# Altium PCB RoControl.PcbDoc
Units mil, origin at the board's own origin, x right, y up, seen from the top; angles counter-clockwise.
Board outline 2550 x 3550 mil, 2 copper layers (Top Layer, Bottom Layer); 101 components, 124 nets, 392 pads, 121 vias.
Unrouted connection lines stored in the file: 1.
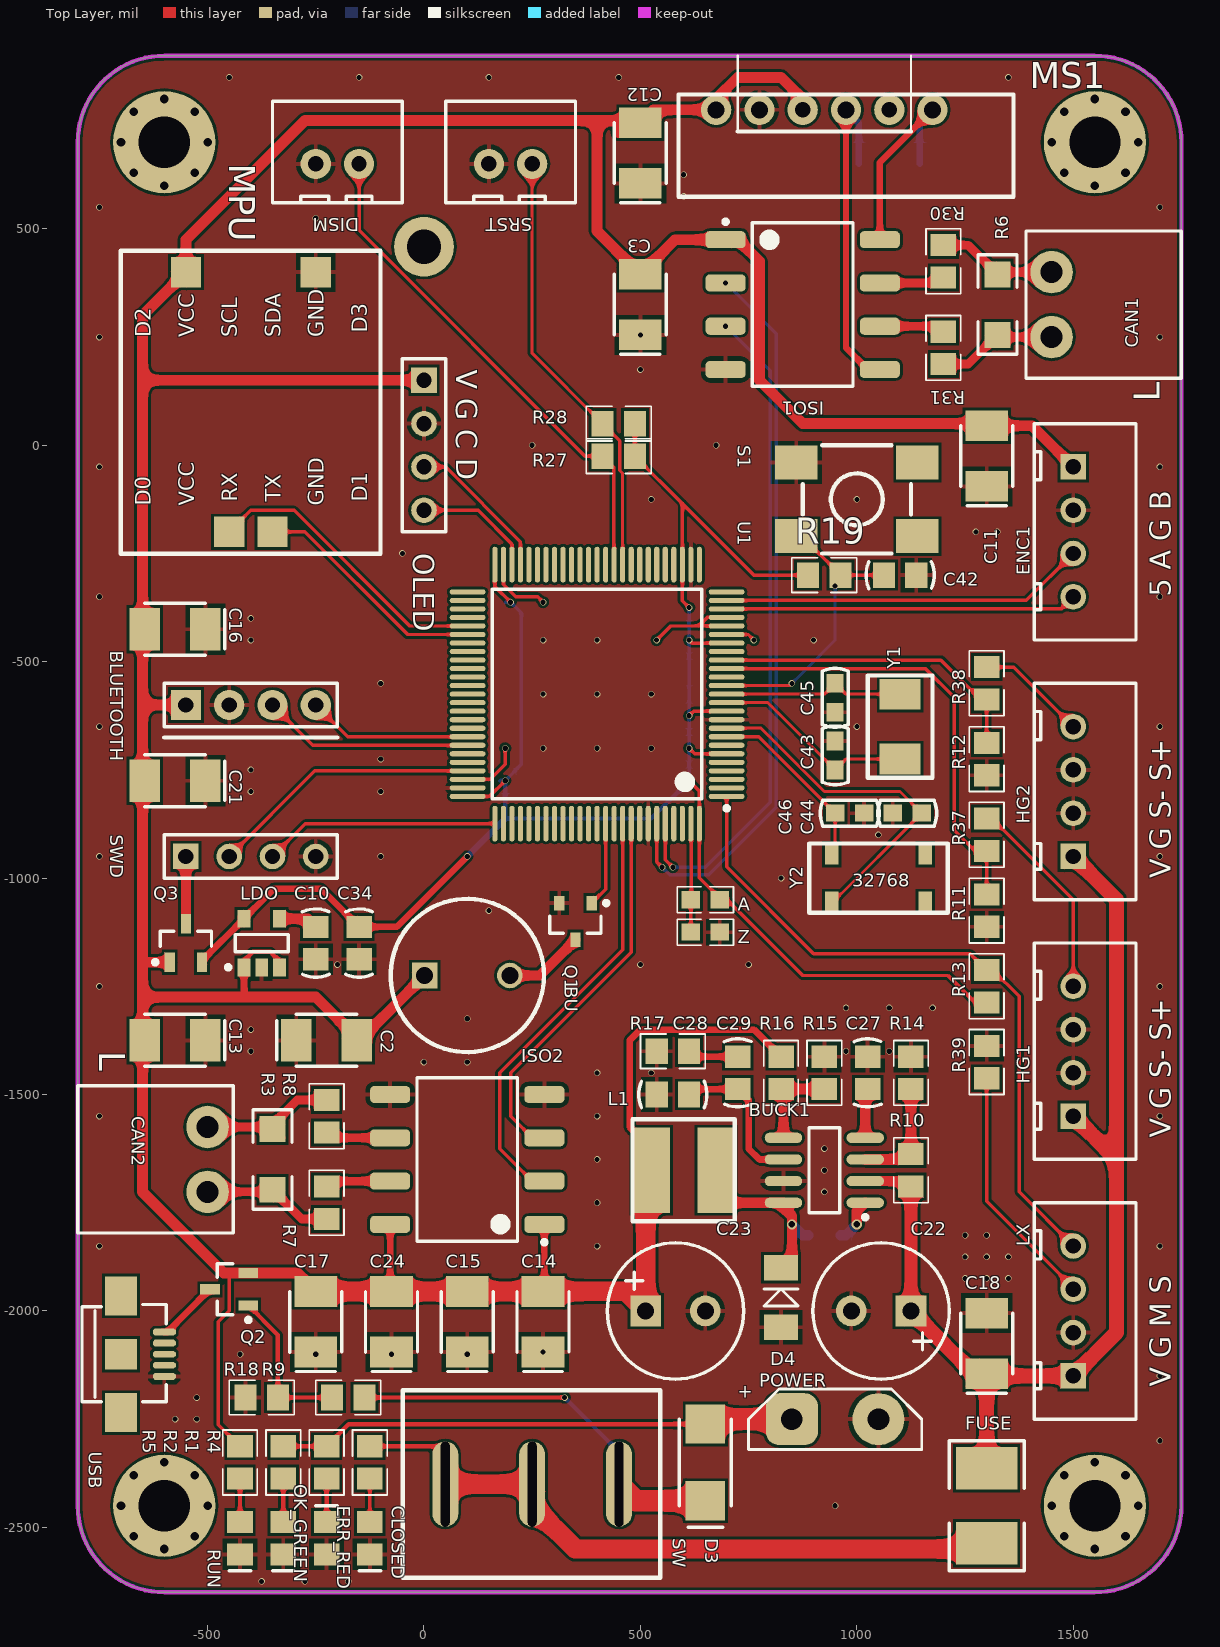
[diagram p0: Top Layer view]
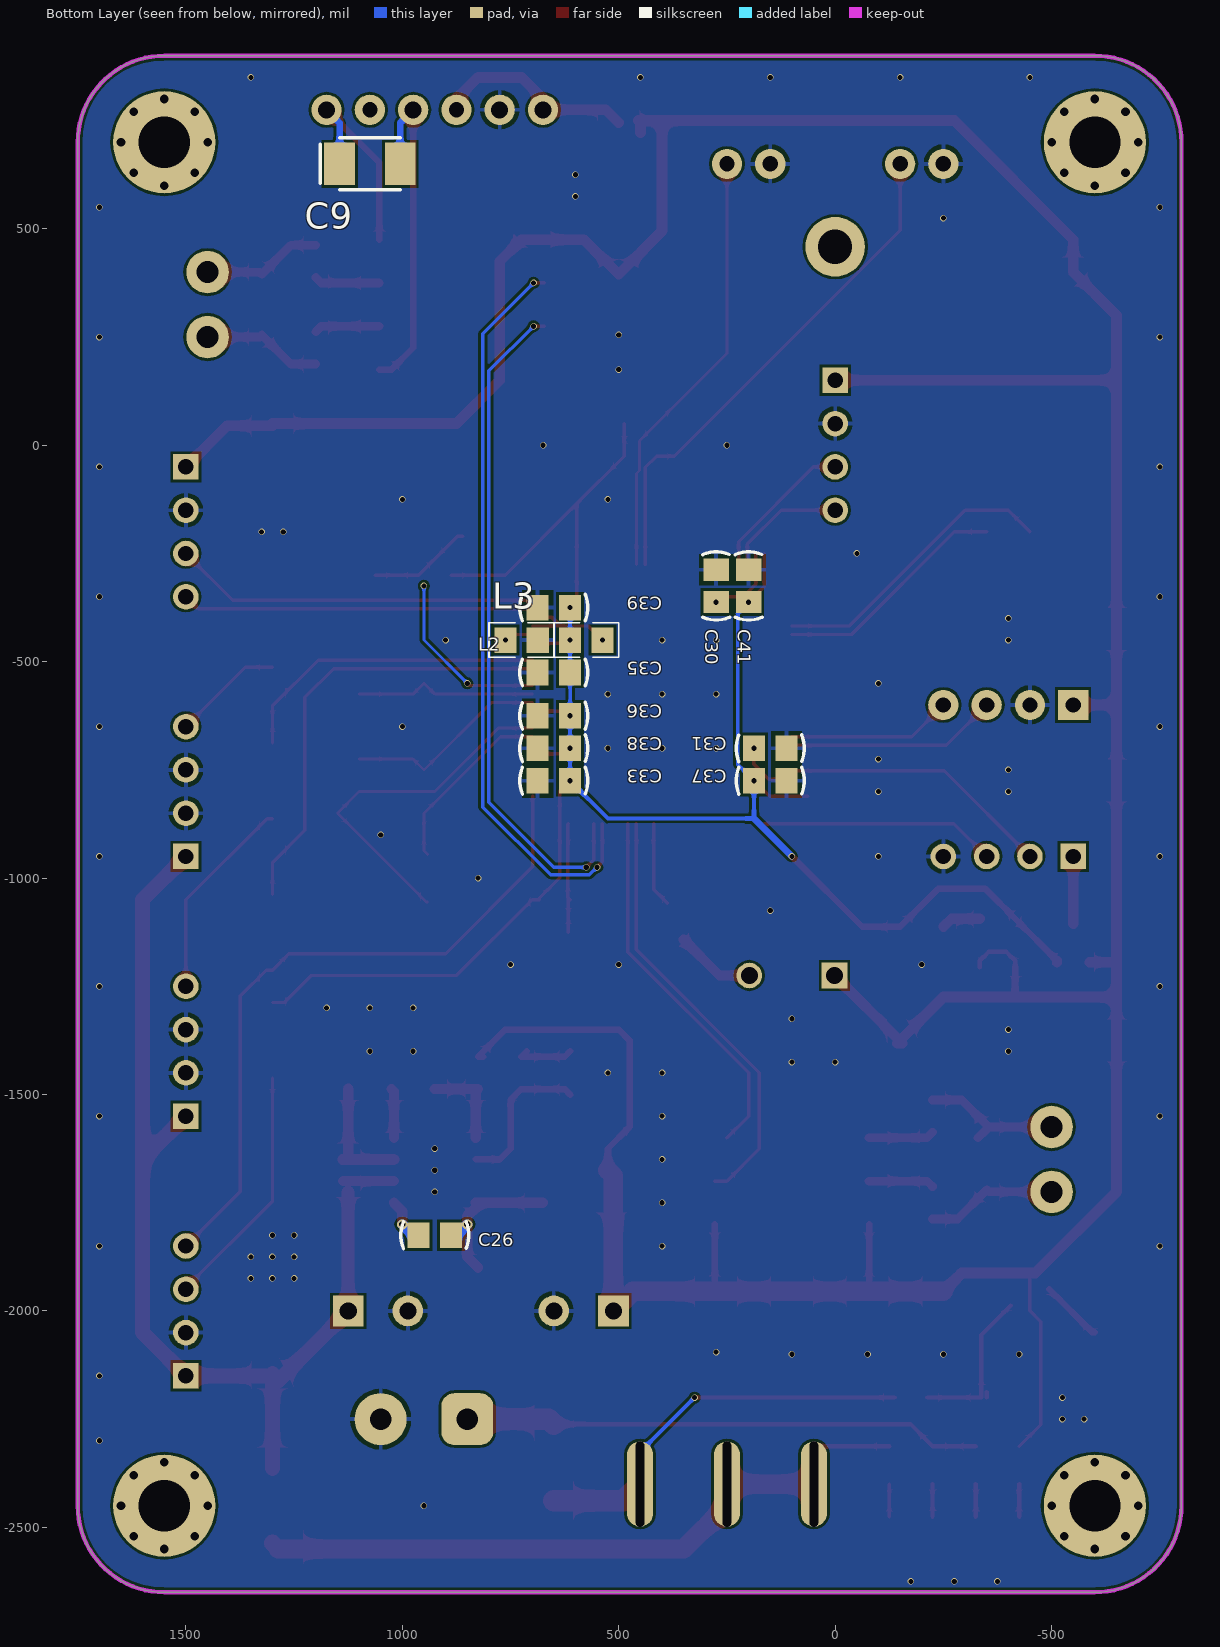
[diagram p1: Bottom Layer view, seen from below]

## Layer stack, top to bottom
Top Solder: solder mask 0.4, Solder Resist, Dk 3.5
Top Layer: signal copper 1.4
Dielectric1: dielectric 12.6, FR-4, Dk 4.8
Bottom Layer: signal copper 1.4
Bottom Solder: solder mask 0.4, Solder Resist, Dk 3.5

## Board outline
-800,-2450 -800,700 cw(c-600,700) -600,900 1550,900 cw(c1550,700) 1750,700 1750,-2450 cw(c1550,-2450) 1550,-2650 -600,-2650 cw(c-600,-2450)

## Design rules (kind name [scope] priority, off if disabled: settings)
Clearance [All] p1: gap=6
ComponentClearance [All] p1 off: gap=1 collisioncheckmode=3 verticalgap=1 showdistances=FALSE
MinimumSolderMaskSliver [All] p1: minsoldermaskwidth=5
PlaneConnect [All] p1: planeconnectstyle=Direct reliefexpansion=20 reliefentries=4 reliefconductorwidth=10 reliefairgap=10
PolygonConnect PolygonConnect_Via [IsVia] p1: connectstyle=Direct reliefconductorwidth=10 reliefentries=4 polygonreliefangle="90 Angle" airgapwidth=10
PolygonConnect [All] p2: connectstyle=Relief reliefconductorwidth=10 reliefentries=4 polygonreliefangle="90 Angle" airgapwidth=10
RoutingCorners [All] p1: cornerstyle=Round minsetback=100 maxsetback=100
RoutingVias [All] p1: holewidth=10 width=15 viastyle="Through Hole" minholewidth=10 minwidth=15 maxholewidth=10 maxwidth=15
SilkToSilkClearance [All] p1: silktosilkclearance=5
SilkToSolderMaskClearance SilkscreenOverComponentPads [IsPad] p1: minsilkscreentomaskgap=10 clearancetoexposedcopper=TRUE
SolderMaskExpansion [All] p1: expansion=4
Width [All] p1: maxlimit=500 minlimit=6 preferedwidth=8
Width GND [InNet('GND')] p2: maxlimit=20 minlimit=15 preferedwidth=15 minimp=50.000000 maximp=50.000000 favimp=50.000000
24 further rules are at their usual default settings.

## Components (designator, comment, footprint, x,y, rotation, side; value= is the part's Value field where it differs from the comment)
A "Res1" 0603-1 650,-1050 r180 top
BLUETOOTH "Header 4" HDR1X4#1 -250,-600 r180 top
BU "BEEP" BEEP 100,-1225 r0 top
BUCK1 "TPS54231/2/3" SOIC8_N 925,-1675 r180 top
C2 "Cap" CAP-3528 -225,-1375 r0 top
C3 "Cap" CAP-3528 500,325 r90 top
C9 "Cap" CAP-3528 1075,650 r180 bottom
C10 "Cap" C-RAD-0805 -250,-1150 r90 top
C11 "Cap" CAP-3528 1300,-25 r90 top
C12 "Cap" CAP-3528 500,675 r90 top
C13 "Cap" CAP-3528 -575,-1375 r180 top
C14 "Cap" CAP-3528 275,-2025 r90 top
C15 "Cap" CAP-3528 100,-2025 r90 top
C16 "Cap" CAP-3528 -575,-425 r180 top
C17 "Cap" CAP-3528 -250,-2025 r90 top
C18 "Cap Pol" CAP-3528 1300,-2075 r90 top
C21 "Cap" CAP-3528 -575,-775 r180 top
C22 "Cap Pol" C-RB-8 1125,-2000 r180 top
C23 "Cap Pol" C-RB-8 512.2,-2000 r0 top
C24 "Cap" CAP-3528 -75,-2025 r90 top
C26 "Cap" C-RAD-0805 925,-1825 r0 bottom
C27 "Cap" C-RAD-0805 1025,-1450 r270 top
C28 "Cap" C-RAD-0805 575,-1500 r0 top
C29 "Cap" C-RAD-0805 725,-1450 r270 top
C30 "Cap" C-RAD-0805 275,-325 r90 bottom
C31 "Cap" C-RAD-0805 150,-700 r180 bottom
C33 "Cap" C-RAD-0805 650,-775 r180 bottom
C34 "Cap" C-RAD-0805 -150,-1150 r90 top
C35 "Cap" C-RAD-0805 650,-525 r180 bottom
C36 "Cap" C-RAD-0805 650,-625 r180 bottom
C37 "Cap" C-RAD-0805 150,-775 r0 bottom
C38 "Cap" C-RAD-0805 650,-700 r180 bottom
C39 "Cap" C-RAD-0805 650,-375 r180 bottom
C41 "Cap" C-RAD-0805 200,-325 r270 bottom
C42 "Cap" C-RAD-0805 1100,-300 r180 top
C43 "Cap" C-RAD-0603 950,-716.54 r270 top
C44 "Cap" C-RAD-0603 1116.54,-850 r0 top
C45 "Cap" C-RAD-0603 950,-583.46 r90 top
C46 "Cap" C-RAD-0603 983.46,-850 r180 top
CAN1 "Header 2" HDR2X1_C 1450,250 r90 top
CAN2 "Header 2" HDR2X1_C -500,-1575 r270 top
CLOSED "LED0" LED_0805 -125,-2525 r270 top
D3 "Diode" DIODE-SMA 650,-2350 r270 top
D4 "D-Schottky" DIODE-1206 825,-2037.8 r90 top
DISM "Header 2" HDR2X1_B1 -250,650 r0 top
ENC1 "Header 4" HDR4X1_B1#1 1500,-50 r270 top
ERR_RED "LED0" LED_0805 -225,-2525 r90 top
FUSE "Fuse" 1812 1300,-2450 r270 top
HG1 "Header 4" HDR4X1_B1#2 1500,-1250 r270 top
HG2 "Header 4" HDR4X1_B1#2 1500,-650 r270 top
ISO1 "ISO1050" SOP254P1040X485-8N 875,325 r0 top
ISO2 "ISO1050" SOP254P1040X485-8N 100,-1650 r180 top
L1 "Inductor" CD54 600,-1675 r180 top
L2 "Inductor" 0805-1 575,-450 r0 bottom
L3 "Inductor" 0805-1 724.61,-450 r0 bottom
LDO "RT9193" SOT104P300X129-5N -375,-1150 r90 top
LX "Header 4" HDR4X1_B1#2 1500,-1850 r270 top
MPU "JY-901" "JY-901 - duplicate" -150.37,-200.63 r90 top
MS1 "IF0505_S" MORNSUN_SIP_LS 975,775 r0 top
OK_GREEN "LED0" LED_0805 -325,-2525 r270 top
OLED "Header 4" HDR1X4#2 0,150 r270 top
POWER "BIG SWITCH" "HEADER 2" 950,-2250 r90 top
Q1 "SI2302" SOT-23_L 350,-1100 r270 top
Q2 "SI2301" SOT-23_N -450,-1950 r180 top
Q3 "SI2301" SOT-23_N -550,-1150 r90 top
R1 "Res1" 0805-1 -325,-2350 r270 top
R2 "Res1" 0805-1 -225,-2350 r270 top
R3 "Res1" 1206 -350,-1650 r270 top
R4 "Res1" 0805-1 -125,-2350 r90 top
R5 "Res1" 0805-1 -425,-2350 r90 top
R6 "Res1" 1206 1325,325 r90 top
R7 "Res1" 0805-1 -225,-1750 r90 top
R8 "Res1" 0805-1 -225,-1550 r270 top
R9 "Res1" 0805-1 -175,-2200 r0 top
R10 "Res1" 0805-1 1125,-1675 r90 top
R11 "Res1" 0805-1 1300,-1075 r270 top
R12 "Res1" 0805-1 1300,-725 r270 top
R13 "Res1" 0805-1 1300,-1250 r270 top
R14 "Res1" 0805-1 1125,-1450 r90 top
R15 "Res1" 0805-1 925,-1450 r90 top
R16 "Res1" 0805-1 825,-1450 r270 top
R17 "Res1" 0805-1 575,-1400 r0 top
R18 "Res1" 0805-1 -375,-2200 r0 top
R19 "Res1" 0805-1 925,-300 r180 top
R27 "Res1" 0805-1 450,-25 r180 top
R28 "Res1" 0805-1 450,50 r180 top
R30 "Res1" 0805-1 1200,425 r270 top
R31 "Res1" 0805-1 1200,225 r90 top
R37 "Res1" 0805-1 1300,-900 r270 top
R38 "Res1" 0805-1 1300,-550 r270 top
R39 "Res1" 0805-1 1300,-1425 r90 top
RUN "LED0" LED_0805 -425,-2525 r270 top
S1 "SW-PB4" SW_PB4_A1 1000,-125 r180 top
SRST "Header 2" HDR2X1_B1 150,650 r0 top
SW "SW-SPST" SW-SPST 250.79,-2390 r270 top
SWD "Header 4" HDR1X4#3 -250,-950 r180 top
U1 "STM32F407V" LQFP-100_M 400,-575 r180 top
USB "USB_M" USB_MICRO -700,-2100 r270 top
Y1 "XTAL5032" XTAL_5032 1100,-650 r90 top
Y2 "32.768K" 32.768K_SMD 1050,-1000 r0 top
Z "Res1" 0603-1 650,-1125 r0 top

## Footprints (in the part's own frame and the unit in brackets; to place one, negate y for a bottom-side part, rotate by r counter-clockwise, add the part's x,y. Pads: shape width x height; smd on the part's side, far side on the other; paste and mask are expansions set on the pad)
32.768K_SMD [mm]
  rect 0.8x1.2 smd: 1(-2.75,-1.4) 2(2.75,-1.4) 3(2.75,1.4) 4(-2.75,1.4)
  silkscreen extent -4.06,-2.03 4.06,2.03
0603-1 [mm] "贴片带丝印"
  rect 1.1x1 smd: 1(-0.85,0) 2(0.85,0)
  silkscreen extent -1.65,-0.76 1.65,0.76, body extent -1.14,-0.38 1.14,0.38, height 1
0805-1 [mm] "贴片带丝印"
  rect 1.3x1.5 smd: 1(-0.95,0) 2(0.95,0)
  silkscreen extent -1.91,-1.02 1.91,1.02, body extent -1.14,-0.51 1.14,0.51, height 1
1206 [mil] "贴片元件"
  rect 60x60 smd: 1(-70,0) 2(70,0)
  silkscreen extent -115,-45 115,45, body extent -75,-35 75,35, height 39
1812 [mm] "保险丝"
  rect 2.5x3.6 smd: 1(-2.2,0) 2(2.2,0)
  silkscreen extent -3.81,-2.2 3.81,2.2, body extent -2.54,-1.65 2.67,1.65, height 1.2
BEEP [mm]
  rect 1.5x1.5 hole 1: 1(-2.5,0)
  round 1.5 hole 1: 2(2.5,0)
  silkscreen extent -4.5,-4.5 4.5,4.5
C-RAD-0603 [mm] "贴片电容"
  rect 1.1x1 smd: 1(-0.85,0) 2(0.85,0)
  silkscreen extent -1.73,-0.76 1.73,0.76, body extent -1.14,-0.38 1.14,0.38, height 1
C-RAD-0805 [mm] "贴片电容"
  rect 1.3x1.5 smd: 1(-0.95,0) 2(0.95,0)
  silkscreen extent -2,-0.79 2,0.79, body extent -1.27,-0.64 1.27,0.64, height 0.9
C-RB-8 [mm] "35V 220UF电容"
  rect 1.8x1.8 hole 1: 1(0,0)
  round 1.8 hole 1: 2(3.5,0)
  silkscreen extent -2.25,-4 5.75,4
CAP-3528 [mm] "钽电容"
  rect 1.8x2.5 smd: 1(-1.778,0) 2(1.778,0)
  silkscreen extent -2.92,-1.52 1.78,1.52, body extent -1.91,-1.4 1.91,1.4, height 1.1
CD54 [mm]
  rect 2.2x5 smd: 1(-1.9,0) 2(1.9,0)
  silkscreen extent -3,-3 3,3
DIODE-1206 [mm] "玻璃封装二极管"
  rect 1.5x2 smd: 1(0,0) 2(3.5,0)
  silkscreen extent 1.25,-1 2.25,1
DIODE-SMA [mm] "贴片二极管"
  rect 2.3x2.3 smd: 1(-2.25,0) 2(2.25,0)
  silkscreen extent -2.54,-1.52 3.81,1.52, body extent -2.92,-1.4 2.92,1.4, height 3
HDR1X4#1 [mil] "Connector; Header; 4 Position"
  round 70 hole 35.43: 1(0,0) 2(100,0) 3(200,0)
  rect 70x70 hole 35.43: 4(300,0)
  silkscreen extent -50,-50 350,50
HDR1X4#2 [mil] "Connector; Header; 4 Position"
  rect 59.06x59.06 hole 35.43: 1(0,0)
  round 59.06 hole 35.43: 2(100,0) 3(200,0) 4(300,0)
  silkscreen extent -50,-50 350,50
HDR1X4#3 [mil] "Connector; Header; 4 Position"
  round 59.06 hole 35.43: 1(0,0) 2(100,0) 3(200,0)
  rect 59.06x59.06 hole 35.43: 4(300,0)
  silkscreen extent -50,-50 350,50
HDR2X1_B1 [mil] "Connector; Header; 4 Position"
  round 70 hole 35.43: 1(0,0) 2(100,0)
  silkscreen extent -100,-90 200,145, body extent -95,-85 200,140, height 59
HDR2X1_C [mm] "3.81接插件"
  round 2.5 hole 1.3: 1(0,0) 2(3.81,0)
  silkscreen extent -2.41,-7.62 6.22,1.5, body extent -2.41,-7.62 6.22,1.4, height 5
HDR4X1_B1#1 [mm] "Connector; Header; 4 Position"
  rect 1.5x1.5 hole 0.9: 1(0,0)
  round 1.5 hole 0.9: 2(2.54,0) 3(5.08,0) 4(7.62,0)
  silkscreen extent -2.54,-2.29 10.16,3.68, body extent -2.41,-2.16 10.03,3.56, height 1.5
HDR4X1_B1#2 [mm] "Connector; Header; 4 Position"
  round 1.5 hole 0.9: 1(0,0) 2(2.54,0) 3(5.08,0)
  rect 1.5x1.5 hole 0.9: 4(7.62,0)
  silkscreen extent -2.54,-2.29 10.16,3.68, body extent -2.41,-2.16 10.03,3.56, height 1.5
"HEADER 2" [mil]
  round 120 hole 50: 1(0,-100)
  rrect50% 120x120 hole 50: 2(0,100)
  silkscreen extent -70,-200 70,200
"JY-901 - duplicate" [mil]
  rect 70x70 smd: 3(0.63,299.63) 4(0.63,199.63) 8(600.63,99.63) 11(600.63,399.63)
  silkscreen extent -50,-50 650,550
LED_0805 [mm] "贴片二极管"
  rect 1.3x1.5 smd: 1(-0.95,0) 2(0.95,0)
  silkscreen extent 1.91,-0.63 1.91,0.64
LQFP-100_M [mm] "Thin QFP, 100"
  oval 2.1x0.3 smd: 1(-7.6,6) 2(-7.6,5.5) 3(-7.6,5) 4(-7.6,4.5) 5(-7.6,4) 6(-7.6,3.5) 7(-7.6,3) 8(-7.6,2.5) 9(-7.6,2) 10(-7.6,1.5) 11(-7.6,1) 12(-7.6,0.5) 13(-7.6,0) 14(-7.6,-0.5) 15(-7.6,-1) 16(-7.6,-1.5) 17(-7.6,-2) 18(-7.6,-2.5) 19(-7.6,-3) 20(-7.6,-3.5) 21(-7.6,-4) 22(-7.6,-4.5) 23(-7.6,-5) 24(-7.6,-5.5) 25(-7.6,-6) 51(7.6,-6) 52(7.6,-5.5) 53(7.6,-5) 54(7.6,-4.5) 55(7.6,-4) 56(7.6,-3.5) 57(7.6,-3) 58(7.6,-2.5) 59(7.6,-2) 60(7.6,-1.5) 61(7.6,-1) 62(7.6,-0.5) 63(7.6,0) 64(7.6,0.5) 65(7.6,1) 66(7.6,1.5) 67(7.6,2) 68(7.6,2.5) 69(7.6,3) 70(7.6,3.5) 71(7.6,4) 72(7.6,4.5) 73(7.6,5) 74(7.6,5.5) 75(7.6,6)
  oval 0.3x2.1 smd: 26(-6,-7.6) 27(-5.5,-7.6) 28(-5,-7.6) 29(-4.5,-7.6) 30(-4,-7.6) 31(-3.5,-7.6) 32(-3,-7.6) 33(-2.5,-7.6) 34(-2,-7.6) 35(-1.5,-7.6) 36(-1,-7.6) 37(-0.5,-7.6) 38(0,-7.6) 39(0.5,-7.6) 40(1,-7.6) 41(1.5,-7.6) 42(2,-7.6) 43(2.5,-7.6) 44(3,-7.6) 45(3.5,-7.6) 46(4,-7.6) 47(4.5,-7.6) 48(5,-7.6) 49(5.5,-7.6) 50(6,-7.6) 76(6,7.6) 77(5.5,7.6) 78(5,7.6) 79(4.5,7.6) 80(4,7.6) 81(3.5,7.6) 82(3,7.6) 83(2.5,7.6) 84(2,7.6) 85(1.5,7.6) 86(1,7.6) 87(0.5,7.6) 88(0,7.6) 89(-0.5,7.6) 90(-1,7.6) 91(-1.5,7.6) 92(-2,7.6) 93(-2.5,7.6) 94(-3,7.6) 95(-3.5,7.6) 96(-4,7.6) 97(-4.5,7.6) 98(-5,7.6) 99(-5.5,7.6) 100(-6,7.6)
  silkscreen extent -7.73,-6.15 6.15,6.82, body extent -7,-7 7,7, height 0.8
MORNSUN_SIP_LS [mil]
  round 70 hole 39.37: 1(-300,0) 2(-200,0) 4(0,0) 6(200,0)
  silkscreen extent -387,-201 387,35, body extent -387,-201 387,35, height 400
SOIC8_N [mm] "8-Pin Small Outline Integrated Circuit Package (SOIC8), IPC Medium Density"
  oval 2.2x0.6 smd: 1(-2.4,1.905) 2(-2.4,0.635) 3(-2.4,-0.635) 4(-2.4,-1.905) 5(2.4,-1.905) 6(2.4,-0.635) 7(2.4,0.635) 8(2.4,1.905)
  silkscreen extent -2.53,-2.5 0.9,2.88, body extent -1.95,-2.45 1.95,2.45, height 1.75
SOP254P1040X485-8N [mm] "SOP, 8-Leads, Body 9.50x6.62mm, Pitch 2.54mm, IPC Medium Density"
  rrect50% 2.35x1 smd: 1(-4.525,3.81) 2(-4.525,1.27) 3(-4.525,-1.27) 4(-4.525,-3.81) 5(4.525,-3.81) 6(4.525,-1.27) 7(4.525,1.27) 8(4.525,3.81)
  silkscreen extent -4.65,-4.8 2.95,4.98, body extent -3.35,-4.8 3.35,4.8, height 4.85
SOT104P300X129-5N [mm] "SOT23, 5-Leads, Body 3.10x3.00mm, Pitch 1.04mm, IPC Medium Density"
  rect 1.05x0.75 smd: 1(-1.425,1.041) 2(-1.425,0) 3(-1.425,-1.041) 4(1.425,-1.041) 5(1.425,1.041)
  silkscreen extent -1.55,-1.55 0.5,2.09, body extent -0.9,-1.55 0.9,1.55, height 1.3
SOT-23_L [mm] "SOT23, 3-Leads, Body 2.9x1.3mm, Pitch 0.95mm, Lead Span 2.3mm, IPC High Density"
  rect 0.85x0.6 smd: 1(-1.075,0.95) 2(-1.075,-0.95) 3(1.075,0)
  silkscreen extent -1.2,-1.5 0.7,1.93, body extent -0.7,-1.5 0.7,1.5, height 1.11
SOT-23_N [mm] "SOT23, 3-Leads, Body 2.9x1.3mm, Pitch 0.95mm, Lead Span 2.3mm, IPC Medium Density"
  rect 1.15x0.6 smd: 1(-1.125,0.95) 2(-1.125,-0.95) 3(1.125,0)
  silkscreen extent -1.25,-1.5 0.7,1.92, body extent -0.7,-1.5 0.7,1.5, height 1.11
SW-SPST [mil]
  oval 196.85x60 hole 20 slot 196.85 at 0 deg: 1(10,200) 2(10,-0.79) 3(10,-201.57)
  silkscreen extent -207,-300 227,295, body extent -207,-300 227,295, height 150
SW_PB4_A1 [mil]
  rect 98.42x78.74 smd: 1(-140,85) 2(-140,-85) 3(140,-85) 4(140,85)
  silkscreen extent -125,-125 125,125, body extent -125,-125 125,125, height 236
USB_MICRO [mm] "USB方孔"
  oct 0.4x1.35 smd: 1(-1.3,2.54) 2(-0.65,2.54) 3(0,2.54) 4(0.65,2.54) 5(1.3,2.54)
  rect 2.286x1.9 smd: 6(3.429,0) 7(-3.429,0)
  rect 1.8x1.9 smd: 8(0,0)
  silkscreen extent -2.92,-2.29 2.79,2.67
XTAL_5032 [mm]
  rect 1.8x2.4 smd: 1(-1.9,0) 2(1.9,0)
  silkscreen extent -3,-1.9 3,1.9

## Part data
A R1 R2 R3 R4 R5 R6 R7 R8 R9 R10 R11 R12 R13 R14 R15 R16 R17 R18 R19 R27 R28 R30 R31 R37 R38 R39 Z: "贴片电阻"
BLUETOOTH OLED SWD: "Header, 4-Pin"
BU: "蜂鸣器"
C2 C3 C9 C10 C11 C12 C13 C14 C15 C16 C17 C21 C24 C26 C27 C28 C29 C30 C31 C33 C34 C35 C36 C37 C38 C39 C41 C42 C43 C44 C45 C46: "无极性电容"
C18 C22 C23: "极性电解电容"
CAN1 CAN2 DISM ENC1 HG1 HG2 LX SRST: "接插件"
CLOSED ERR_RED OK_GREEN RUN: "发光二极管"
D3: "二极管"
D4: "肖特基二极管"
FUSE: library part "Fuse 2", "保险丝"
L1 L2 L3: "电感"
MPU: "君悦智控高精度9轴传感器"
POWER: library part "Header 2 BIG", "Header, 2-Pin"
Q1: library part IRLML2402, "HEXFET Power MOSFET"
Q2 Q3: library part IRLML5103, "HEXFET Power MOSFET"
S1: "微动开关"
SW: "Single-Pole, Single-Throw Switch"
U1: "STM32单片机100引脚"
USB: "MicroUSB接口"

## Free pads (board coordinates)
  round 236.22 hole 118.11: 0(-600,-2450) 0(-600,700) 0(1550,-2450) 0(1550,700)
  round 19.68 hole 19.68: 5(-600,-2350) 5(-600,800) 5(1550,-2350) 5(1550,800) 6(-670.71,-2379.29) 6(-670.71,770.71) 6(1479.29,-2379.29) 6(1479.29,770.71) 7(-700,-2450) 7(-700,700) 7(1450,-2450) 7(1450,700) 8(-670.71,-2520.71) 8(-670.71,629.29) 8(1479.29,-2520.71) 8(1479.29,629.29) 9(-600,-2550) 9(1550,-2550) 9(1550,600) 10(-600,600) 10(-529.29,-2520.71) 10(-529.29,629.29) 10(1620.71,-2520.71) 10(1620.71,629.29) 11(-500,-2450) 11(-500,700) 11(1650,-2450) 11(1650,700) 12(-529.29,-2379.29) 12(-529.29,770.71) 12(1620.71,-2379.29) 12(1620.71,770.71)
  round 137.8 hole 78.74: 13(0,458.66)
  round 70 hole 35: 18(875,775) 19(1075,775)

## Via types
v1: diameter 15, hole 11.81, Top Layer to Bottom Layer, 115 vias
v2: diameter 15, hole 12, Top Layer to Bottom Layer, 4 vias
v3: diameter 23.62, hole 15, Top Layer to Bottom Layer, 2 vias

## Nets (pads, with @x,y where several pads share a name; then routed paths per layer and width w, separated by ;. In a path a pad name is that pad's centre, name@x,y a point inside that pad or via, vN(x,y) a via of type N, cw(c..) or ccw(c..) an arc to the next point about the centre after c; other vN are vias at no path point)
3V3_DEBUG: Q3.3 SWD.4 | length 155.7
  Top Layer w23.62: Q3.3 SWD.4
3V3_MCU: A.1 C33.2 C34.2 C35.2 C36.2 C37.2 C38.2 C39.2 C41.2 L2.2 LDO.5 Q3.2 R13.2 R19.2 R27.1 R28.1 U1.6 U1.11 U1.19 U1.28 U1.50 U1.75 U1.100 | length 4720.2
  Top Layer w8: U1.75@63.78,-811.22 U1.75 151.38,-811.22 v2(187.6,-775) ; U1.50@163.78,-250.79 U1.50 163.78,-326.38 v2(200,-362.6) ; R28.1 R27.1 596.85,-134.45 ; v1(612.4,-775) 636.22,-798.82 U1.100 636.22,-998.82 A.1@687.4,-1050 ; v1(612.4,-700) 625.2,-712.8 U1.6 ; v1(612.4,-625) 623.03,-614.37 U1.11 ; v1(612.4,-450) 619.29,-456.89 U1.19 ; v1(612.4,-375) 596.85,-359.45 U1.28 596.85,-134.45 ; A.1 A.1@687.4,-1050 ; R19.2 762.4,-300 596.85,-134.45 ; R13.2 1272.98,-1287.4 1210.58,-1225 875,-1225 700,-1050 A.1@687.4,-1050
  Top Layer w15: Q3.2@-512.6,-1190.51 LDO.5 -347.09,-1025 -237.6,-1025 C34.2 -62.6,-1112.6 v1(100,-950)
  Top Layer w23.62: Q3.2 Q3.2@-512.6,-1190.51
  Bottom Layer w8: C37.2@175,-775 C37.2 v2(187.6,-775) 225,-737.6 225,-387.4 C41.2 ; C41.2@187.4,-362.6 v2(200,-362.6) ; v1(612.4,-775) v1(612.4,-700) v1(612.4,-625) v1(612.4,-450) v1(612.4,-375)
  Bottom Layer w10: v2(187.6,-775) 187.6,-862.4 525,-862.4 v1(612.4,-775)
  Bottom Layer w15: v1(100,-950) 187.6,-862.4
5V1: BLUETOOTH.4 BU.1 C2.2 C3.2 C11.2 C12.2 C13.2 C14.2 C15.2 C16.2 C17.2 C21.2 C23.1 C24.2 ENC1.1 ISO1.1 ISO2.1 ISO2.8 L1.2 LDO.1 LDO.3 MPU.11 MS1.1 OLED.1 pad.18 Q2.2 Q3.1 R5.2 R16.1 | length 10526.9
  Top Layer w8: -450,-1925.2 -450,-2000 -475,-2025 -475,-2262.6 R5.2
  Top Layer w10: LDO.1 -415.98,-1190.98 -395.49,-1170.49 -354.51,-1170.49 -334.02,-1190.98 LDO.3
  Top Layer w15: -415.98,-1275 LDO.1 ; ISO2.8 -78.15,-1951.85 C24.2 ; C14.2 278.15,-1951.85 ISO2.1 ; L1.2 525.2,-1625.2 475,-1575 475,-1375 500,-1350 762.4,-1350 R16.1 R16.1@812.6,-1412.6
  Top Layer w23.62: -650,-1194.29 Q3.1
  Top Layer w25: BLUETOOTH.4 -650,-600 ; C17.2 -292.4,-1912.6 Q2.2 -462.4,-1912.6 -650,-1725 -650,-1275 ; OLED.1 -650,150 ; BU.1 C2.2@-149.21,-1375.79 ; 450,721.85 450,745 455,750 400,750 ; C12.2 530,775 MS1.1 675,800 725,850 825,850 875,800 pad.18 ; C11.2 1405,45 ENC1.1 ; C11.2@1300,50 875,50 775,150 775,425 725,475 ISO1.1 580,475 C3.2 400,495 400,750 ; -650,-1275 -450,-1275 -415.98,-1275 -250,-1275 C2.2@-149.21,-1375.79 ; -650,-1275 -650,-1194.29 -650,-600 ; -650,-600 -650,150 ; -650,150 -650,300 MPU.11 -550,475 -275,750 400,750 ; C2.2@-149.21,-1375.79 -143.43,-1381.57 -155,-1381.57 C2.2@-149.21,-1375.79
  Top Layer w45: C17.2 C24.2 C15.2 C14.2 467.2,-1955 C23.1 512.2,-1687.99 L1.2
5V_ISO: C9.1 ISO1.8 MS1.6 pad.19 | length 487.9
  Top Layer w15: ISO1.8 1053.15,653.15 MS1.6
  Bottom Layer w15: C9.1 1145,745 MS1.6
5V_USB: Q2.3 USB.1 | length 146.6
  Top Layer w15: USB.1 -593.11,-2048.82 Q2.3
A0: ENC1.4 U1.23 | length 812.4
  Top Layer w8: U1.23 1471.85,-378.15 ENC1.4
A1: ENC1.3 U1.24 | length 845.7
  Top Layer w8: U1.24 1391.54,-358.46 ENC1.3
A2: U1.25
A3: U1.26
A4: U1.29
A5: U1.30
A6: U1.31
A7: U1.32
A8: U1.67
A9: BLUETOOTH.1 U1.68 | length 364.6
  Top Layer w8: BLUETOOTH.1@-238.29,-611.71 -176.57,-673.43 U1.68
A10: BLUETOOTH.2 U1.69 | length 489.4
  Top Layer w8: BLUETOOTH.2 -256.89,-693.11 U1.69
A11: U1.70
A12: U1.71
A15: U1.77
B0: R28.2 SRST.2 U1.35 | length 1012.4
  Top Layer w7: SRST.2 250,212.6 R28.2 452.31,10.29 452.31,-58.46 459.06,-65.21 U1.35
B1: DISM.2 R27.2 U1.36 | length 1193.6
  Top Layer w8: DISM.2 -150,497.08 372.08,-25 R27.2 438.81,-51.21 438.81,-275.23 U1.36
B2: U1.37
B3: Q1.1 U1.89 | length 196.8
  Top Layer w8: Q1.1 419.69,-1025.39 U1.89
B4: U1.90
B5: ISO2.2 U1.91 | length 1002.7
  Top Layer w8: ISO2.2 250,-1700 175,-1625 175,-1450 459.06,-1165.94 U1.91
B6: ISO2.3 U1.92 | length 862
  Top Layer w8: ISO2.3@250,-1600 200,-1550 200,-1450 478.74,-1171.26 U1.92
B7: U1.93
B8: ISO1.2 U1.95 | length 1726.4
  Top Layer w8: U1.95 537.8,-962.8 v1(550,-975) ; ISO1.2@671.85,375 v1(696.85,375)
  Bottom Layer w8: v1(550,-975) 550.25,-975 567.75,-992.5 657.5,-992.5 814,-836 814,257.85 v1(696.85,375)
B9: ISO1.3 U1.96 | length 1562.9
  Top Layer w8: U1.96 557.48,-957.48 v1(575,-975) ; ISO1.3@671.85,275 v1(696.85,275)
  Bottom Layer w8: v1(575,-975) 650,-975 800,-825 800,171.85 v1(696.85,275)
B10: OLED.3 U1.47 | length 347.4
  Top Layer w8: OLED.3 50,-50 222.83,-222.83 U1.47
B11: OLED.4 U1.48 | length 283.2
  Top Layer w8: OLED.4 125,-150 203.15,-228.15 U1.48
B12: U1.51
B13: U1.52
B14: U1.53
B15: U1.54
C0: U1.15
C1: R11.1 R37.2 U1.16 | length 1039.7
  Top Layer w8: U1.16 1158.74,-515.94 1225,-582.2 1225,-889.42 1300,-964.42 R11.1
C2: R12.1 R38.2 U1.17 | length 730.3
  Top Layer w8: U1.17 1194.44,-496.26 1300,-601.82 R12.1
C3: U1.18
C4: U1.33
C5: U1.34
C6: U1.63
C7: U1.64
C8: U1.65
C9: U1.66
C10: U1.78
C11: U1.79
C12: U1.80
C13: U1.7
C14: C46.2 U1.8 Y2.4 | length 422.2
  Top Layer w7: U1.8 773.43,-673.43 C46.2 950,-936.61 Y2.4
C15: C44.2 U1.9 Y2.1 | length 825.3
  Top Layer w7: U1.9 778.74,-653.74 925,-800 1100,-800 C44.2 944.88,-1055.12 Y2.1
CAN1_H: CAN1.2 R6.2 R30.1 | length 280
  Top Layer w20: R30.1 1257.6,462.4 R6.2 1330,400 CAN1.2
CAN1_L: CAN1.1 R6.1 R31.1 | length 280
  Top Layer w20: R31.1 1257.6,187.6 R6.1 1330,250 CAN1.1
CANC_H: CAN2.2 R3.2 R7.1 | length 305
  Top Layer w20: CAN2.2 -355,-1725 R3.2 -282.6,-1787.4 R7.1
CANC_L: CAN2.1 R3.1 R8.1 | length 336.2
  Top Layer w20: CAN2.1 R3.1@-355,-1575 ; R3.1@-330,-1600 R3.1 R3.1@-355,-1575 ; R8.1 -292.6,-1512.6 R3.1@-355,-1575
D0: U1.81
D1: U1.82
D2: U1.83
D3: U1.84
D4: U1.85
D5: U1.86
D6: U1.87
D7: U1.88
D8: MPU.3 U1.55 | length 682.3
  Top Layer w8: MPU.3 -400,-150 -300,-150 -32.48,-417.52 U1.55
D9: MPU.4 U1.56 | length 549
  Top Layer w8: MPU.4 -275,-200 -37.8,-437.2 U1.56
D10: U1.57
D11: U1.58
D12: U1.59
D13: U1.60
D14: U1.61
D15: U1.62
E0: U1.97
E1: U1.98
E2: LX.1 R13.1 U1.1 | length 1591.2
  Top Layer w8: U1.1 699.21,-974.21 900,-1175 1262.4,-1175 R13.1 1314.42,-1212.6 1375,-1273.18 1375,-1725 LX.1
E3: U1.2
E4: U1.3
E5: U1.4
E6: U1.5
E7: U1.38
E8: U1.39
E9: U1.40
E10: U1.41
E11: U1.42
E12: U1.43
E13: U1.44
E14: U1.45
E15: U1.46
GND: BLUETOOTH.3 BUCK1.7 C2.1 C3.1 C10.1 C11.1 C12.1 C13.1 C14.1 C15.1 C16.1 C17.1 C18.2 C21.1 C22.2 C23.2 C24.1 C27.1 C28.1 C30.2 C31.2 C33.1 C34.1 C35.1 C36.1 C37.1 C38.1 C39.1 C41.1 C42.1 C43.1 C44.1 C45.1 C46.1 CLOSED.2 D4.1 DISM.1 ENC1.2 ERR_RED.1 HG1.2 HG1.3 HG2.2 HG2.3 ISO1.4 ISO2.4 ISO2.5 L3.1 LDO.2 LX.3 MPU.8 MS1.2 OK_GREEN.2 OLED.2 POWER.1 Q1.2 R11.2 R12.2 R14.2 R15.2 R17.1 R18.1 R39.2 RUN.2 S1.3 SRST.1 SWD.1 U1.10 U1.27 U1.74 U1.94 USB.5 Z.2
  other v1: -375,-2625 -275,-2625 -175,-2625 950,-2450 1700,-2300 -575,-2250 -525,-2250 -525,-2200 1700,-2150 -425,-2100 -250,-2100 -75,-2100 100,-2100 275,-2095 1250,-1925 1300,-1925 1350,-1925 1250,-1875 1300,-1875 1350,-1875 -750,-1850 400,-1850 1700,-1850 1250,-1825 1300,-1825 400,-1750 925,-1725 925,-1675 400,-1650 925,-1625 -750,-1550 400,-1550 1700,-1550 400,-1450 525,-1450 0,-1425 100,-1425 -400,-1400 975,-1400 1075,-1400 -400,-1350 100,-1325 975,-1300 1075,-1300 1175,-1300 -750,-1250 1700,-1250 -200,-1200 500,-1200 750,-1200 150,-1075 825,-1000 -750,-950 -100,-950 1700,-950 1050,-900 -400,-800 -100,-800 -400,-750 -100,-725 275,-700 400,-700 525,-700 -750,-650 1000,-650 1700,-650 275,-575 400,-575 525,-575 -100,-550 -400,-450 275,-450 400,-450 900,-450 -400,-400 -750,-350 1700,-350 -50,-250 1275,-200 1325,-200 525,-125 1000,-125 -750,-50 1700,-50 250,0 675,0 500,175 -750,250 1700,250 500,255 -250,525 -750,550 1700,550 600,575 600,625 -450,850 -150,850 150,850 450,850 1350,850
GND_ISO: C9.2 ISO1.5 MS1.4 | length 786.3
  Top Layer w15: MS1.4 975,225 1025,175 ISO1.5
  Bottom Layer w15: MS1.4 1005,745 C9.2
NetA_2: A.2 U1.99 Z.1 | length 261.1
  Top Layer w8: Z.1 A.2 ; U1.99 617.5,-875.18 617.5,-1045.1 A.2@616.54,-1046.06 ; A.2 612.6,-1050 A.2@616.54,-1046.06 ; A.2 A.2@616.54,-1046.06
NetBU_2: BU.2 Q1.3 | length 185.8
  Top Layer w23.62: BU.2 267.32,-1225 Q1.3
NetBUCK1_1: BUCK1.1 C26.2 | length 106
  Top Layer w23.62: v3(1000,-1800) 1000,-1769.49 BUCK1.1
  Bottom Layer w23.62: C26.2 975,-1825 v3(1000,-1800)
NetBUCK1_3: BUCK1.3 R10.2 R14.1 | length 268.3
  Top Layer w25: BUCK1.3 R10.2@1137.6,-1650 ; R10.2 R14.1
NetBUCK1_4: BUCK1.4 C27.2 | length 114.9
  Top Layer w23.62: BUCK1.4 1019.49,-1492.91 C27.2
NetBUCK1_5: BUCK1.5 R15.1 R16.2 | length 220.4
  Top Layer w23.62: BUCK1.5 R16.2@830.51,-1492.91 ; R15.1 R16.2@830.51,-1487.4 ; R16.2@830.51,-1492.91 R16.2 R16.2@830.51,-1487.4 ; R16.2@830.51,-1492.91 R16.2@830.51,-1487.4
NetBUCK1_6: BUCK1.6 C28.2 C29.2 | length 356.6
  Top Layer w15: C28.2 625,-1487.4 C29.2 750,-1512.4 750,-1625 775,-1650 BUCK1.6
NetBUCK1_8: BUCK1.8 C26.1 D4.2 L1.1 | length 376.5
  Top Layer w23.62: L1.1@675,-1750 BUCK1.8 825,-1755.51 850,-1780.51 v3(850,-1800) 850,-1875 D4.2
  Bottom Layer w23.62: v3(850,-1800) 875,-1825 C26.1
NetC10_2: C10.2 LDO.4 | length 91.8
  Top Layer w23.62: LDO.4 -268.7,-1093.9 C10.2
NetC29_1: C29.1 R17.2 | length 135.6
  Top Layer w15: R17.2 625,-1412.6 C29.1 C29.1@712.4,-1400
NetC30_1: C30.1 U1.49 | length 179.2
  Top Layer w8: U1.49@183.46,-250.79 U1.49 183.46,-321.31 212.15,-350 262.4,-350 v2(275,-362.6)
NetC31_1: C31.1 U1.73 | length 138.5
  Top Layer w8: U1.73 153.15,-771.85 187.6,-737.4 v2(187.6,-700)
NetCLOSED_1: CLOSED.1 R4.1 | length 75.2
  Top Layer w8: CLOSED.1@-125,-2475.2 R4.1@-125,-2400
NetERR_RED_2: ERR_RED.2 R2.2 | length 75.2
  Top Layer w10: ERR_RED.2@-225,-2475.2 R2.2@-225,-2400
NetHG1_1: HG1.1 R37.1 | length 477.6
  Top Layer w8: R37.1 1312.6,-862.6 1500,-1050 HG1.1
NetHG2_1: HG2.1 R38.1 | length 256.9
  Top Layer w8: R38.1 1362.6,-512.6 HG2.1
NetISO1_6: ISO1.6 R31.2 | length 152.1
  Top Layer w20: ISO1.6 1187.4,275 R31.2
NetISO1_7: ISO1.7 R30.2 | length 152.1
  Top Layer w20: ISO1.7 1187.4,375 R30.2
NetISO2_6: ISO2.6 R8.2 | length 152.1
  Top Layer w20: R8.2 -212.4,-1600 ISO2.6
NetISO2_7: ISO2.7 R7.2 | length 152.1
  Top Layer w20: R7.2 -212.4,-1700 ISO2.7
NetL2_1: L2.1 U1.21 U1.22 | length 247.8
  Top Layer w8: v1(537.6,-450) 570.08,-417.52 634.65,-417.52 ; U1.21 634.65,-417.52 ; U1.22 654.33,-397.83 634.65,-417.52
NetL3_2: L3.2 U1.20 | length 68.1
  Top Layer w7: U1.20 749.21,-437.2 v1(762.01,-450)
NetLX_2: LX.2 R39.1 | length 570.4
  Top Layer w8: R39.1 1300,-1746.72 1500,-1946.72 LX.2
NetOK_GREEN_1: OK_GREEN.1 R1.2 | length 75.2
  Top Layer w10: OK_GREEN.1@-325,-2475.2 R1.2@-325,-2400
NetQ2_1: Q2.1 R9.1 R18.2 | length 378.6
  Top Layer w10: Q2.1 -337.6,-2055.51 R18.2 R9.1 ; R18.2@-350.2,-2200 R18.2@-350.2,-2187.4
NetR5_1: R5.1 RUN.1 | length 75.2
  Top Layer w10: RUN.1@-425,-2475.2 R5.1@-425,-2400
NRST: C42.2 R19.1 S1.4 U1.14 | length 659.5
  Top Layer w7: U1.14 844.69,-555.32 v1(850,-550)
  Top Layer w8: S1.4 872.6,-210 R19.1@962.6,-300 ; R19.1 R19.1@962.6,-300 ; C42.2 R19.1@962.6,-300
  Bottom Layer w7: v1(850,-550) 950,-450 v1(950,-325)
OSCIN: C43.2 U1.12 Y1.1 | length 475.6
  Top Layer w7: U1.12 794.69,-594.69 C43.2 975.2,-724.8 Y1.1
OSCOUT: C45.2 U1.13 Y1.2 | length 421.6
  Top Layer w7: U1.13 925,-575 C45.2 975.2,-575.2 Y1.2
POWER+: D3.2 R9.2 SW.1 | length 929.9
  Top Layer w10: R9.2 v1(325,-2200)
  Top Layer w50: SW.1 489.37,-2438.58 D3.2
  Bottom Layer w10: v1(325,-2200) 450.79,-2325.79 SW.1
POWER_ERR: D3.1 POWER.2 R1.1 R2.1 | length 1200.9
  Top Layer w10: R1.1 R2.1 -173.82,-2261.42 D3.1
  Top Layer w50: D3.1 661.42,-2250 POWER.2
SWCLK: SWD.2 U1.76 | length 545.2
  Top Layer w8: SWD.2 -274.21,-874.21 U1.76
SWDIO: SWD.3 U1.72 | length 632.7
  Top Layer w8: SWD.3 -252.17,-752.17 U1.72
V+: FUSE.2 R4.2 SW.2 SW.3 | length 1602.4
  Top Layer w10: R4.2 37.4,-2312.6 37.4,-2388.19 SW.3
  Top Layer w40: SW.2@250,-2450 SW.2 ; FUSE.2@1286.61,-2550 FUSE.2
  Top Layer w45: SW.3 SW.2 ; SW.2@250,-2450 350,-2550 FUSE.2@1286.61,-2550
VIN: BUCK1.2 C18.1 C22.1 FUSE.1 HG1.4 HG2.4 LX.4 R10.1 | length 2439.1
  Top Layer w23: BUCK1.2 R10.1@1137.6,-1700
  Top Layer w30: C22.1 R10.1@1125,-1725
  Top Layer w35: C22.1 C18.1@1285,-2160 ; FUSE.1 C18.1@1300,-2170 ; C18.1 1305,-2150 LX.4 1600,-2050 1600,-1650 ; HG1.4 1600,-1650 ; HG2.4 1600,-1050 1600,-1650
pads on no net: S1.1 S1.2 USB.2 USB.3 USB.4 USB.6 USB.7 USB.8 Y2.2 Y2.3

## Polygon pours and split planes (outlines as drawn)
GND on Top Layer "Bottom Layer-No Net" (solid, remove dead copper, pour order 0): -850,975 1800,975 1800,-2725 1775,-2750 1750,-2725 -875,-2725
GND on Bottom Layer "Bottom Layer-No Net" (solid, remove dead copper, pour order 2): -825,975 1750,975 1775,950 1800,925 1800,-2725 -850,-2725

## Keep-outs
Keep-Out Layer:
  the board outline again, w10

## Silkscreen, mask and mechanical layers (free items; w line width, h text height)
Top Overlay:
  lines w5: 725,725 725,900 ; 1125,725 1125,900
  lines w10: -600,-675 -200,-675 ; 725,725 1125,725
  text "V G C D" at 75,175 h48 r270
  text "L" at 1700,100 h60 r90
  text "5 A G B" at 1725,-350 h48 r90
  text "V G S- S+" at 1725,-1000 h48 r90
  text "L" at -750,-1400 h60 r270
  text "V G S- S+" at 1725,-1600 h48 r90
  text "V G M S" at 1725,-2175 h48 r90
  text "+" at 725,-2200 h30

## Text inside footprints (layer, text, board x,y; h text height)
MPU: Top Overlay "VCC" at -531,-140 h35 r90; Top Overlay "VCC" at -531,250 h35 r90; Top Overlay "GND" at -231,-140 h35 r90; Top Overlay "GND" at -231,250 h35 r90; Top Overlay "RX" at -431,-130 h35 r90; Top Overlay "TX" at -331,-130 h35 r90; Top Overlay "SDA" at -331,250 h35 r90; Top Overlay "SCL" at -431,250 h35 r90; Top Overlay "D0" at -631,-140 h35 r90; Top Overlay "D1" at -131,-130 h35 r90; Top Overlay "D2" at -631,250 h35 r90; Top Overlay "D3" at -131,260 h35 r90
Y2: Top Overlay "32768" at 990,-1020 h30